# EAGLE board nRF-Serial-v12-Class-Unrouted (EAGLE 6.6.0)

Size 101.6 x 81.28 mm. Coordinates in mm from the lower left corner, seen from the top.
Outline: 0,0 101.6,0 101.6,81.28 0,81.28 0,0
Copper layers (1*16): Top 0.035mm / dielectric 1.5mm / Bottom 0.035mm
Design rules "default": minimum track width 8mil, minimum drill 20mil, track to track 8mil, track to pad 8mil, pad to pad 8mil, via to via 8mil, smd to smd 8mil, copper to edge 10mil, drill to drill 8mil, minimum pad ring 12mil, minimum via ring 10mil, stop-mask expansion 4mil, vias tented up to drill 25mil, thermal gap 10mil
Net classes: 1 vcc: width 0.305 mm; 2 gnd: width 0.203 mm

## Footprints (pad centres in the part's own frame; a part is rotated, then mirrored left to right if it is on the bottom)
C0402 = smd 0.7 x 0.9: 1 -0.65,0; 2 0.65,0
EIA3216 = smd 1.4 x 1.6: A 1.4,0; C -1.4,0
2X3 = drill 1.016 octagon: 1 0,0; 2 0,2.54; 3 2.54,0; 4 2.54,2.54; 5 5.08,0; 6 5.08,2.54
1X08 = drill 1.016 square: 1 0,0 | drill 1.016: 2 2.54,0; 3 5.08,0; 4 7.62,0; 5 10.16,0; 6 12.7,0; 7 15.24,0; 8 17.78,0
1X07 = drill 1.016: 1 0,0; 2 2.54,0; 3 5.08,0; 4 7.62,0; 5 10.16,0; 6 12.7,0; 7 15.24,0
LED-0603 = smd 0.8 x 0.8: A 0,-0.75; C 0,0.75
TQFP32-08 = smd 1.27 x 0.559: 1 -4.293,2.8; 2 -4.293,2; 3 -4.293,1.2; 4 -4.293,0.4; 5 -4.293,-0.4; 6 -4.293,-1.2; 7 -4.293,-2; 8 -4.293,-2.8; 17 4.293,-2.8; 18 4.293,-2; 19 4.293,-1.2; 20 4.293,-0.4; 21 4.293,0.4; 22 4.293,1.2; 23 4.293,2; 24 4.293,2.8 | smd 0.559 x 1.27: 9 -2.8,-4.293; 10 -2,-4.293; 11 -1.2,-4.293; 12 -0.4,-4.293; 13 0.4,-4.293; 14 1.2,-4.293; 15 2,-4.293; 16 2.8,-4.293; 25 2.8,4.293; 26 2,4.293; 27 1.2,4.293; 28 0.4,4.293; 29 -0.4,4.293; 30 -1.2,4.293; 31 -2,4.293; 32 -2.8,4.293
SSOP28DB = smd 0.348 x 1.397: 1 -4.225,-3.656; 2 -3.575,-3.656; 3 -2.925,-3.656; 4 -2.275,-3.656; 5 -1.625,-3.656; 6 -0.975,-3.656; 7 -0.325,-3.656; 8 0.325,-3.656; 9 0.975,-3.656; 10 1.625,-3.656; 11 2.275,-3.656; 12 2.925,-3.656; 13 3.575,-3.656; 14 4.225,-3.656; 15 4.225,3.656; 16 3.575,3.656; 17 2.925,3.656; 18 2.275,3.656; 19 1.625,3.656; 20 0.975,3.656; 21 0.325,3.656; 22 -0.325,3.656; 23 -0.975,3.656; 24 -1.625,3.656; 25 -2.275,3.656; 26 -2.925,3.656; 27 -3.575,3.656; 28 -4.225,3.656
FIDUCIAL-1X2 = smd 1 x 1: 1 0,0
STAND-OFF = hole 3.302: 0,0
TRF-24G-SOCKET = smd 0.74 x 1.727: P$1 0,0; P$2 1.27,0; P$3 2.54,0; P$4 3.81,0; P$5 5.08,0; P$6 5.08,4.064; P$7 3.81,4.064; P$8 2.54,4.064; P$9 1.27,4.064; P$10 0,4.064
USB-MINIB = smd 2.5 x 0.5: D+ 2.5,0; D- 2.5,0.8; GND 2.5,-1.6; ID 2.5,-0.8; VBUS 2.5,1.6 | smd 2.5 x 2: GND@1 -3,-4.5; GND@2 -3,4.5; GND@3 2.5,4.5; GND@4 2.5,-4.5 | hole 0.9: 0,2.2; 0,-2.2

## Placement (x,y rotation side)
C1  0.1uF  [C0402]  27.94,30.48 0 top
C2  10uF  [EIA3216]  27.94,7.62 180 top
C3  0.1uF  [C0402]  27.94,15.24 0 top
C4  0.1uF  [C0402]  27.94,24.13 0 top
C5  10uF  [EIA3216]  27.94,11.43 180 top
C6  0.1uF  [C0402]  27.94,16.51 0 top
C7  0.1uF  [C0402]  27.94,26.67 0 top
C8  0.1uF  [C0402]  27.94,29.21 180 top
C9  0.1uF  [C0402]  27.94,27.94 180 top
JP1  AVR_PRG  [2X3]  55.88,57.15 180 top
JP2  nRF24L01  [1X08]  57.15,64.77 180 top
JP3  [1X07]  57.15,60.96 180 top
LED1  Red  [LED-0603]  22.86,26.67 270 top
LED2  Green  [LED-0603]  22.86,24.13 270 top
LED3  Green  [LED-0603]  22.86,21.59 270 top
LED4  Blue  [LED-0603]  22.86,25.4 90 top
LED5  Blue  [LED-0603]  22.86,20.32 90 top
LED6  Blue  [LED-0603]  22.86,22.86 90 top
R1  330  [C0402]  27.94,13.97 180 top
R2  330  [C0402]  27.94,22.86 180 top
R3  330  [C0402]  27.94,25.4 180 top
R4  330  [C0402]  27.94,17.78 0 top
R5  330  [C0402]  27.94,19.05 0 top
R6  330  [C0402]  27.94,20.32 0 top
R7  10K  [C0402]  27.94,21.59 0 top
U1  ATMEGA168  [TQFP32-08]  52.07,21.59 180 top
U2  FT232RL-BASICSSOP  [SSOP28DB]  39.37,22.86 270 top
U$1  LOGO-SFENEW  [SFE-NEW-WEBLOGO]  73.16,64.32 0 top
U$2  FIDUCIAL1X2  [FIDUCIAL-1X2]  87.63,76.2 0 top
U$3  FIDUCIAL1X2  [FIDUCIAL-1X2]  90.17,76.2 0 top
U$4  STAND-OFF  [STAND-OFF]  97.79,19.05 0 top
U$5  STAND-OFF  [STAND-OFF]  97.79,13.97 0 top
U$6  STAND-OFF  [STAND-OFF]  97.79,8.89 0 top
U$7  STAND-OFF  [STAND-OFF]  97.79,3.81 0 top
U$8  TRF-24G  [TRF-24G-SOCKET]  52.07,50.8 270 top
U$9  CREATIVE_COMMONS  [CREATIVE_COMMONS]  20.32,-10.16 0 top  (outside the outline)
X1  USBSMD  [USB-MINIB]  26.67,54.61 90 top

## Library data of the parts
C1-C9 JP1-JP3 LED1-LED6 R1-R7 U1 U2 U$1-U$9 X1 = SparkFun

## Nets
3.3V: C3.1 C5.A C6.1 C7.1 C9.1 JP1.2 JP3.1 LED2.A LED3.A LED4.A LED5.A LED6.A R1.2 R7.2 U1.4 U1.6 U1.18 U2.4 U2.17 U$8.P$1
CE: JP2.7 JP3.2 U1.13 U$8.P$9
CLK2: U1.9 U$8.P$8
CSN: JP2.6 JP3.3 U1.14 U$8.P$7
DATA: JP3.6 U1.11 U$8.P$5
DOUT2: U1.1 U$8.P$3
DR1: JP3.4 U1.10 U$8.P$4
DR2: U1.2 U$8.P$2
GND: C1.2 C2.C C3.2 C5.C C6.2 C7.2 C8.1 C9.2 JP1.6 JP2.1 JP3.7 LED1.C U1.3 U1.5 U1.21 U2.7 U2.18 U2.21 U2.25 U2.26 U$8.P$10 X1.GND
IRQ: JP2.2 U1.32
MISO: JP1.1 JP2.3 U1.16
MOSI: JP1.4 JP2.4 U1.15
N$1: C8.2 U1.20
N$2: C4.2 U2.2
N$3: R2.1 U2.23
N$4: R3.1 U2.22
N$5: LED3.C R3.2
N$6: LED2.C R2.2
N$9: LED5.C R4.2
N$10: LED4.C R5.2
N$11: LED6.C R6.2
N$12: LED1.A R1.1
N$16: U2.16 X1.D-
N$17: U2.15 X1.D+
RST: C4.1 JP1.5 R7.1 U1.29
RXI: U1.30 U2.1
SCK: JP1.3 JP2.5 JP3.5 U1.17 U$8.P$6
STAT0: R4.1 U1.23
STAT1: R5.1 U1.24
STAT2: R6.1 U1.25
TXO: U1.31 U2.5
VCC: C1.1 C2.A JP2.8 U2.20 X1.VBUS

## Tracks (layer width: path | path; a pad name or v marks a point on that pad's centre or on a via)
3.3V  (19 unrouted)
CE  (3 unrouted)
CLK2  (1 unrouted)
CSN  (3 unrouted)
DATA  (2 unrouted)
DOUT2  (1 unrouted)
DR1  (2 unrouted)
DR2  (1 unrouted)
GND  (21 unrouted)
IRQ  (1 unrouted)
MISO  (2 unrouted)
MOSI  (2 unrouted)
N$1  (1 unrouted)
N$2  (1 unrouted)
N$3  (1 unrouted)
N$4  (1 unrouted)
N$5  (1 unrouted)
N$6  (1 unrouted)
N$9  (1 unrouted)
N$10  (1 unrouted)
N$11  (1 unrouted)
N$12  (1 unrouted)
N$16  (1 unrouted)
N$17  (1 unrouted)
RST  (3 unrouted)
RXI  (1 unrouted)
SCK  (4 unrouted)
STAT0  (1 unrouted)
STAT1  (1 unrouted)
STAT2  (1 unrouted)
TXO  (1 unrouted)
VCC  (4 unrouted)

## Text on the board
Top: 11-11-08
tPlace: Nordic USB Serial Converter | nRF24L01 | nRF2401A | VCC | GND | GND | 3.3V | 3.3V | STAT0 | STAT1 | STAT2 | POWER | TX | RX | RF-24G | P. Dokter
tValues: DNP